# Altium PCB v007 pcb.PCBDOC
Units mm, origin at the board's own origin, x right, y up, seen from the top; angles counter-clockwise.
Board outline 15.3 x 5.5 mm, 2 copper layers (Top Layer, Bottom Layer); 11 components, 32 nets, 85 pads, 22 vias.
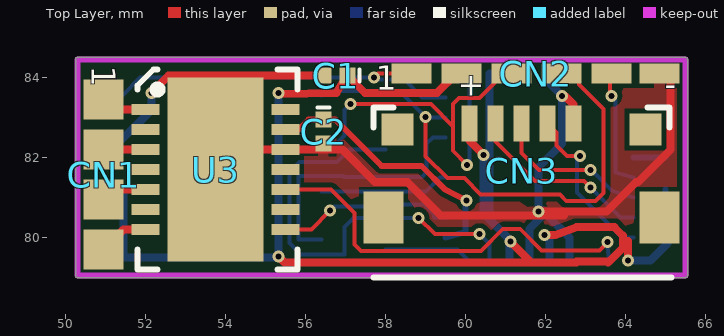
[diagram p0: Top Layer view]
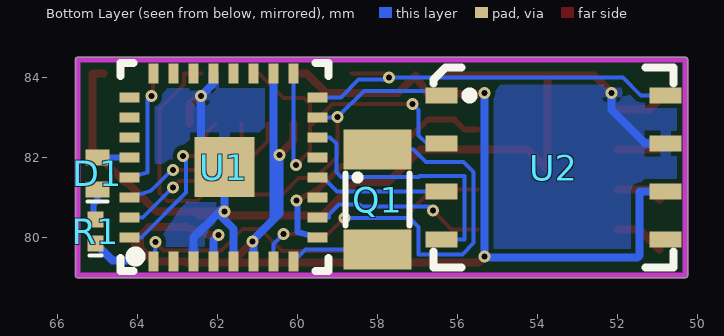
[diagram p1: Bottom Layer view, seen from below]

## Layer stack, top to bottom
Top Layer: signal copper 0.0356
Dielectric: core 0.32, FR-4, Dk 4.8
Bottom Layer: signal copper 0.0356

## Board outline
50.3,79 cw(c50.3,79.05) 50.25,79.05 50.25,84.45 cw(c50.3,84.45) 50.3,84.5 65.5,84.5 cw(c65.5,84.45) 65.55,84.45 65.55,79.05 cw(c65.5,79.05) 65.5,79

## Design rules (kind name [scope] priority, off if disabled: settings)
Clearance Clearance_Pad [All vs IsPad] p1: gap=0.12
Clearance Clearance_Via [(IsVia) vs (IsVia)] p2: gap=0.12
Clearance Polygon [InPoly vs IsPad] p3: gap=0.15
Clearance [All] p4: gap=0.12
ComponentClearance [All] p1: gap=0.254 collisioncheckmode=0 verticalgap=0.254
HoleSize [All] p1: absolutevalues=TRUE maxlimit=2.54 minlimit=0.04 maxpercent=80.000 minpercent=20.000
PolygonConnect [All] p1: connectstyle=Relief reliefconductorwidth=0.254 reliefentries=4 polygonreliefangle="90 Angle"
RoomDefinition "v007 schematics" [InComponentClass('v007 schematics')] p1: confinementstyle=ConfineIn formatcopy=TRUE lockcomponents=FALSE outline 0,0 50.8,0 50.8,25.4 0,25.4
RoutingCorners [All] p1: cornerstyle=Round minsetback=1 maxsetback=1
RoutingVias [All] p1: holewidth=0.15 width=0.3 viastyle="Through Hole" minholewidth=0.15 minwidth=0.3 maxholewidth=0.15 maxwidth=0.3
SMDNeckDown [All] p1: percent=100.000
SolderMaskExpansion SolderMaskExpansion_1 [(IsVia)] p1: expansion=-0.15
SolderMaskExpansion [All] p2: expansion=0.05
TestPointUsage [All] p1: valid=0 allowmultiple=FALSE
Testpoint [All] p1: side=15 testpointundercomponent=TRUE minsize=1.016 maxsize=2.54 preferedsize=1.524 minholesize=0 maxholesize=1.016 preferedholesize=0.813 testpointgrid=0.025 style=1023 order=0123456789
Width Width_3 [(InNet('PD5') OR InNet('PC5') OR InNet('NetGreen Led_1'))] p1: maxlimit=0.15 minlimit=0.15 preferedwidth=0.15
Width Width_2 [(InNet('HEAD 1') OR InNet('HEAD 2') OR InNet('HEAD 3') OR InNet('HCOMMON'))] p2: maxlimit=0.2 minlimit=0.2 preferedwidth=0.2
Width Width_1 [(InNet('GND') OR InNet('VCC'))] p3: maxlimit=0.2 minlimit=0.2 preferedwidth=0.2
Width [All] p4: maxlimit=0.1 minlimit=0.1 preferedwidth=0.1
16 further rules are at their usual default settings.

## Components (designator, comment, footprint, x,y, rotation, side; value= is the part's Value field where it differs from the comment)
C1 "490-3167-1-ND" CC0603(0201) 57.05,83.9 r180 top
C2 "490-3167-1-ND" CC0603(0201) 56.6,82.95 r270 top
CN1 "No component mounted" SU04LS 50.95,83.45 r270 top
CN2 "No component mounted" SU06LST 58.05,84.5 r0 top
CN3 "H11635CT-ND" "MICRO USB RECEPTACLE SMALL" 57.4,83.85 r0 top
D1 "511-1615-1-ND" CC1005(0402) 65.25,81.1 r90 bottom
Q1 "535-9542-1-ND" "QUARTZ SMD (SMALL)" 57.1,82.7 r270 bottom
R1 "P330AGCT-ND" CC0603(0201) 65.2,79.85 r90 bottom
U1 "ATMEL ATMEGA168V" "32M1-A L 3" 64.45,79.15 r90 bottom
U2 "ATMEL AT45DB161D-MU-2.5" "8M1-A MLF 2" 56.6,84.25 r180 bottom
U3 "Delta Asic" "DELTA ASIC - 4" 55.8,84.2 r270 top

## Footprints (in the part's own frame and the unit in brackets; to place one, negate y for a bottom-side part, rotate by r counter-clockwise, add the part's x,y. Pads: shape width x height; smd on the part's side, far side on the other; paste and mask are expansions set on the pad)
"8M1-A MLF 2" [mm] "for at45db161d"
  rect 0.8x0.4 smd: 1(0.2,-0.7) 2(0.2,-1.9) 3(0.2,-3.1) 4(0.2,-4.3) 5(5.8,-4.3) 6(5.8,-3.1) 7(5.8,-1.9) 8(5.8,-0.7)
  silkscreen extent 0,-5 6,0, body extent 0,-5 6,0, height 1
"32M1-A L 3" [mm] "atmel uc modified"
  rect 0.5x0.25 smd: 1(0.25,-0.85) 2(0.25,-1.35) 3(0.25,-1.85) 4(0.25,-2.35) 5(0.25,-2.85) 6(0.25,-3.35) 7(0.25,-3.85) 8(0.25,-4.35) 17(4.95,-4.35) 18(4.95,-3.85) 19(4.95,-3.35) 20(4.95,-2.85) 21(4.95,-2.35) 22(4.95,-1.85) 23(4.95,-1.35) 24(4.95,-0.85)
  rect 0.25x0.5 smd: 9(0.85,-4.95) 10(1.35,-4.95) 11(1.85,-4.95) 12(2.35,-4.95) 13(2.85,-4.95) 14(3.35,-4.95) 15(3.85,-4.95) 16(4.35,-4.95) 25(4.35,-0.25) 26(3.85,-0.25) 27(3.35,-0.25) 28(2.85,-0.25) 29(2.35,-0.25) 30(1.85,-0.25) 31(1.35,-0.25) 32(0.85,-0.25)
  rect 1.5x1.5 smd: 33(2.607,-2.624)
  silkscreen extent 0.01,-5.22 5.21,-0.02, body extent 0.1,-5.1 5.1,-0.1, height 1
CC0603(0201) [mm]
  rect 0.4x0.4 smd: 1(0,-0.15) 2(0.6,-0.15)
  silkscreen extent -0.3,-0.3 -0.3,0, body extent 0,-0.3 0.6,0, height 1
CC1005(0402) [mm]
  rect 0.4x0.6 smd: 1(0.1,-0.25) 2(0.9,-0.25)
  silkscreen extent -0.2,-0.5 -0.2,0, body extent 0,-0.5 1,0, height 1
"DELTA ASIC - 4" [mm]
  rect 0.28x0.7 smd: 1(1,-3.8) 2(1.5,-3.8) 3(2,-3.8) 4(2.5,-3.8) 5(3,-3.8) 6(3.5,-3.8) 7(4,-3.8) 8(4,-0.3) 9(3.5,-0.3) 10(3,-0.3) 11(2.5,-0.3) 12(2,-0.3) 13(1.5,-0.3) 14(1,-0.3)
  rect 4.6x2.4 smd: 15(2.5,-2.05)
  silkscreen extent 0,-4 5,0, body extent 0,-4 5,0, height 0.7
"MICRO USB RECEPTACLE SMALL" [mm] "Micro USB Receptacle (1981568-1-c - type b)"
  rect 0.4x0.9 smd: 1(2.7,-1) 2(3.35,-1) 3(4,-1) 4(4.65,-1) 5(5.3,-1)
  rect 1x1.3 smd: ""(0.55,-3.35) ""(7.45,-3.35)
  rect 0.8x0.8 smd: ""(0.9,-1.15) ""(7.1,-1.15)
  silkscreen extent 0.3,-4.85 7.75,-0.6, body extent 0.25,-5.55 7.75,-0.55, height 3
"QUARTZ SMD (SMALL)" [mm] "CC7V-T1A"
  rect 1x1.7 smd: 1(0.5,-0.9) 2(3,-0.9)
  silkscreen extent 1.1,-1.7 2.4,-0.1, body extent 0.1,-1.65 3.3,-0.15, height 0.5
SU04LS [mm] "Single Row Vertical pin header 4 pin 1.25mm - DF13-4P-1.25DSA"
  rect 1x1 smd: 1(0,0) 2(1.25,0) 3(2.5,0) 4(3.75,0)
  body extent -1.25,-5.9 5.45,0.43, height 3.4
SU06LST [mm]
  rect 1x0.5 smd: 1(0.6,-0.4) 2(1.85,-0.4) 3(3.1,-0.4) 4(4.35,-0.4) 5(5.6,-0.4) 6(6.8,-0.4)

## Part data
C1 C2: library part Cap, "Capacitor"
CN1: library part "4pin smd"
CN2: library part "6pin smd"
CN3: library part "micro usb"
D1: library part LED3, "Typical BLUE SiC LED"
Q1: library part "2pin smd"
R1: library part Res3, "Resistor"
U1: library part ATmega8L-8MC, "8-Bit AVR Microcontroller with 8K Bytes of In-System Programmable Flash Memory"
U2: library part at45db041b, "ATMEL 4MBit DataFlash"
U3: library part "delta asic 3volt"

## Via types
v1: diameter 0.3, hole 0.15, Top Layer to Bottom Layer, 22 vias

## Nets (pads, with @x,y where several pads share a name; then routed paths per layer and width w, separated by ;. In a path a pad name is that pad's centre, name@x,y a point inside that pad or via, vN(x,y) a via of type N, cw(c..) or ccw(c..) an arc to the next point about the centre after c; other vN are vias at no path point)
ADC6: U1.19
ADC7: U1.22
GND: C1.2 C2.2 CN2.6 CN3.5 U1.3 U1.5 U1.21 U1.33 U2.7 U3.12 U3.15 | length 32.7
  Top Layer w0.2: v1(52.146,83.617) 52.579,84.05 53.75,84.05 ; C2.2 C2.2@56.45,82.2 ; C1.2 53.75,84.05 ; v1(61.826,80.645) 62.461,80.645 ; v1(62.417,83.54) 62.484,83.54 62.7,83.324 CN3.5 ; CN2.6@64.85,84.1 65.126,84.1 65.126,82.195 64.313,81.382 64.262,81.382 63.525,80.645 62.461,80.645 ; 53.75,84.05 U3.15 54.25,82.2 U3.12 C2.2@56.45,82.2 ; C2.2@56.45,82.2 56.921,82.2 57.74,81.382 58.547,81.382 59.381,80.548 61.826,80.548 62.461,80.548 62.461,80.645
  Bottom Layer w0.2: U2.7 51.308,82.35 52.146,83.188 v1(52.146,83.617) ; U1.5 61.6,80.218 61.927,80.544 61.99,80.608 ; v1(61.826,80.645) v1@61.826,80.772 ; U1.21 62.1,83.857 v1(62.417,83.54) 62.417,82.348 U1.33 v1@61.826,80.772 ; U1.3 62.6,79.998 61.99,80.608 ; v1@61.826,80.772 61.889,80.709 61.99,80.608
HCOMMON: CN1.1 U3.1 | length 1.2
  Top Layer w0.2: CN1.1 51.2,83.2 U3.1
"HEAD 1": CN1.2 U3.3 | length 1
  Top Layer w0.2: CN1.2 U3.3
"HEAD 2": CN1.3 U3.5 | length 1.2
  Top Layer w0.2: CN1.3 51.2,81.2 U3.5@52,81.2
"HEAD 3": CN1.4 U3.7 | length 1.3
  Top Layer w0.2: CN1.4 51.45,80.2 U3.7
NetD1_1: D1.1 R1.2 | length 0.8
  Bottom Layer w0.15: D1.1@65,81.2 65,80.923 65.1,80.823 65.1,80.55 R1.2
PB0: U1.12 U2.3 | length 3.2
  Bottom Layer w0.1: U2.3 59.01,81.15 59.36,81.5 U1.12
PB1: U1.13
PB2: U1.14 U2.4 | length 6.7
  Bottom Layer w0.1: U2.4 55.829,79.95 55.829,81.534 56.947,81.534 56.965,81.516 58.909,81.516 59.03,81.636 59.03,82.348 59.182,82.5 U1.14
PB3: CN2.4 U1.15 U2.1 | length 13.1
  Top Layer w0.1: v1@59.011,83 v1(59.004,83.007) 59.004,82.029 59.55,81.483 59.969,81.483 60.376,81.077 62.357,81.077 62.519,80.915 63.255,80.915 63.453,81.113 63.453,83.207 62.84,83.82 62.84,84.1 CN2.4
  Bottom Layer w0.1: U2.1 56.531,83.668 58.344,83.668 v1(59.004,83.007) ; v1@59.011,83 U1.15
PB4: CN2.1 U1.16 U2.8 | length 10.2
  Top Layer w0.1: v1(57.709,83.998) v1@57.811,84.1 ; v1@57.761,83.945 57.772,83.978 v1@57.811,84.1 ; CN2.1 v1@57.811,84.1
  Bottom Layer w0.1: U2.8 51.419,83.55 51.867,83.998 v1(57.709,83.998) ; v1@57.761,83.945 58.473,83.945 58.918,83.5 U1.16
PB5: CN2.3 U1.17 U2.2 | length 10.1
  Top Layer w0.1: v1(57.125,83.337) 59.131,83.337 59.69,82.779 ; v1(60.042,81.817) 59.69,82.169 59.69,82.779 ; CN2.3 60.96,84.1 60.35,83.49 59.842,83.49 59.69,83.338 59.69,82.779
  Bottom Layer w0.1: U2.2 56.769,82.35 56.972,82.553 56.972,83.185 v1(57.125,83.337) ; v1(60.042,81.817) 60.1,81.874 U1.17
PC0: U1.23
PC1: U1.24
PC2: U1.25
PC3: U1.26
PC4: U1.27
PC5: D1.2 U1.28 | length 0.8
  Bottom Layer w0.15: U1.28 64.694,82 D1.2
PD2: CN3.4 U1.32 | length 4.2
  Top Layer w0.1: CN3.4 62.279,82.621 62.279,82.296 62.533,82.042 v1(62.858,82.042)
  Bottom Layer w0.1: v1(62.858,82.042) 62.786,81.97 62.786,81.12 63.906,80 U1.32
PD3: U1.1 U3.10 | length 10.2
  Top Layer w0.1: U3.10@55.5,81.2 56.642,81.2 57.226,80.616 57.226,79.828 57.388,79.667 60.388,79.667 60.94,80.219 61.361,80.219 61.9,79.68 63.348,79.68 v1(63.551,79.883)
  Bottom Layer w0.1: v1(63.551,79.883) 63.551,79.754 U1.1
PD4: U1.2
PD5: C2.1 U1.9 U3.13 | length 6.7
  Top Layer w0.15: U3.13 55.829,82.7 56.079,82.95 C2.1 56.744,82.95 57.906,81.788 58.899,81.788 59.477,81.21 v1(60.02,80.924)
  Bottom Layer w0.15: U1.9 59.995,80.137 59.995,80.899 v1(60.02,80.924)
PD6: U1.10 U3.8 | length 4.4
  Top Layer w0.1: U3.8 56.146,80.2 v1(56.617,80.67)
  Bottom Layer w0.1: v1(56.617,80.67) 56.718,80.772 58.395,80.772 58.448,80.826 58.958,80.826 59.207,80.576 59.207,80.5 U1.10
PD7: U1.11
RST: CN2.5 U1.29 | length 3
  Top Layer w0.1: CN2.5 63.61,84.1 63.61,83.583 v1(63.652,83.541)
  Bottom Layer w0.1: v1(63.652,83.541) 63.754,83.439 63.754,81.627 U1.29
RX: CN3.3 U1.30 | length 4
  Top Layer w0.1: CN3.3 61.4,82.118 61.832,81.686 v1(63.119,81.686)
  Bottom Layer w0.1: v1(63.119,81.686) 63.144,81.686 63.662,81.169 U1.30
TOSC1: Q1.1 U1.7 | length 11
  Top Layer w0.1: v1(58.826,80.493) 59.233,80.086 v1(60.35,80.086)
  Bottom Layer w0.1: Q1.1 57.099,82.2 56.789,81.89 55.849,81.89 55.598,81.638 55.598,79.861 55.88,79.578 56.972,79.578 56.972,80.264 57.201,80.493 v1(58.826,80.493) ; v1(60.35,80.086) 60.6,79.837 U1.7
TOSC2: Q1.2 U1.8 | length 2.2
  Bottom Layer w0.1: Q1.2 59.8,79.7 U1.8
TX: CN3.2 U1.31 | length 4.7
  Top Layer w0.1: CN3.2 60.75,82.396 61.739,81.407 62.962,81.407 v1(63.119,81.25)
  Bottom Layer w0.1: v1(63.119,81.25) 63.869,80.5 U1.31
VCC: C1.1 CN2.2 CN3.1 R1.1 U1.4 U1.6 U1.18 U2.6 | length 37.3
  Top Layer w0.2: v1(55.321,79.527) 55.474,79.375 62.771,79.375 ; v1@55.347,83.591 56.769,83.617 C1.1 57.483,83.617 59.29,83.617 59.773,84.1 CN2.2 ; CN3.1 60.1,82.419 v1(60.452,82.067) ; v1(61.125,79.896) 61.62,79.4 ; v1(61.976,80.061) 62.23,80.061 62.771,80.258 63.719,80.258 63.932,80.046 63.932,79.792 ; 62.771,79.4 63.541,79.4 63.566,79.375 63.957,79.766 63.937,79.786 64.059,79.908 v1(64.059,79.426)
  Bottom Layer w0.2: U2.6 51.45,81.15 ; 51.45,81.154 51.45,79.55 51.5,79.5 v1@55.321,79.5 ; v1@55.321,79.55 v1(55.321,83.617) ; v1@60.45,82.067 60.45,80.6 60.6,80.45 ; v1@60.452,82.05 v1(60.452,82.067) ; v1@60.6,82.05 60.6,80.45 ; v1@60.6,82.067 60.6,83.7 ; 60.6,83.7 U1.18 ; U1.6 v1@61.1,79.871 ; v1@61.1,79.95 60.6,80.45 ; v1(61.976,80.061) 62.1,79.937 U1.4 ; v1(64.059,79.426) 64.626,79.426 R1.1
pads on no net: CN3. U1.20 U2.5 U3.2 U3.4 U3.6 U3.9 U3.11 U3.14

## Polygon pours and split planes (outlines as drawn)
GND on Top Layer "Bottom Layer-No Net" (solid, remove dead copper, pour order 1000): 50.3,84.4 65.6,84.4 65.6,79.1 50.3,79.1
GND on Bottom Layer "Bottom Layer-No Net" (solid, remove dead copper, pour order 1001): 65.6,84.4 65.547,84.35 65.547,79.1 50.353,79.1 50.3,79.15 50.3,84.4

## Keep-outs
Keep-Out Layer:
  lines w0.15: 50.3,79.05 65.5,79.05 65.5,84.45 50.3,84.45 50.3,79.05

## Silkscreen, mask and mechanical layers (free items; w line width, h text height)
Top Overlay:
  text "+                  -" at 59.8,83.35 h1

## Dimensions
50.3,79.05 to 50.3,84.45 on Mechanical 1
50.3,79.05 to 65.5,79.05 on Mechanical 1

## Text inside footprints (layer, text, board x,y; h text height)
CN1: Top Overlay "1" at 50.65,84.3 h0.6 r270
CN2: Top Overlay "1" at 57.75,83.7 h0.6